# Altium PCB Clock_Lab.PcbDoc
Units mm, origin at the board's own origin, x right, y up, seen from the top; angles counter-clockwise.
Board outline 254.99 x 33.09 mm, 2 copper layers (Top Layer, Bottom Layer), stack 1.65 mm thick; 46 components, 26 nets, 170 pads, 249 vias.
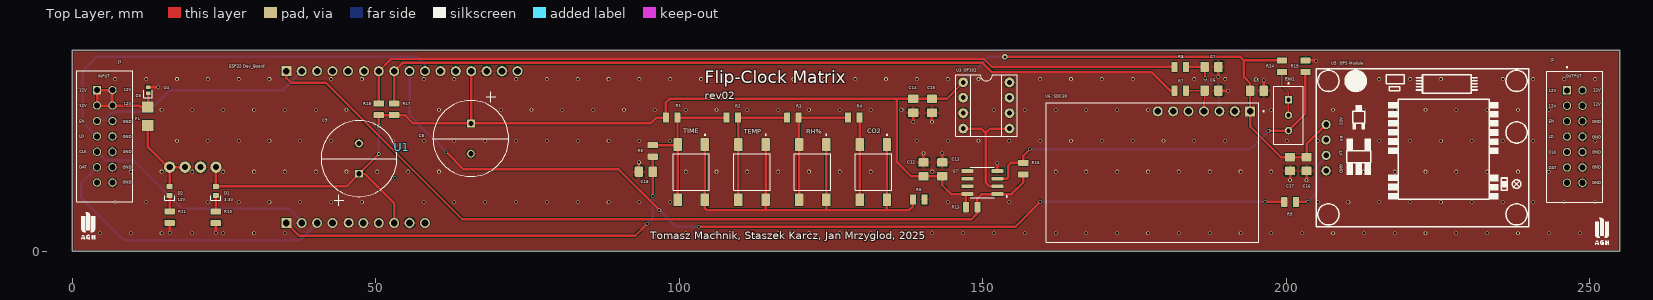
[diagram p0: Top Layer view]
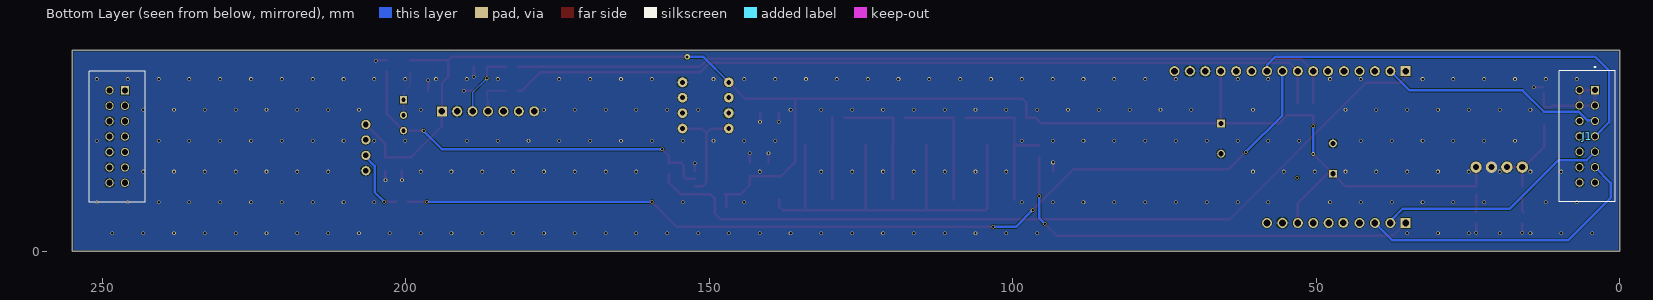
[diagram p1: Bottom Layer view, seen from below]
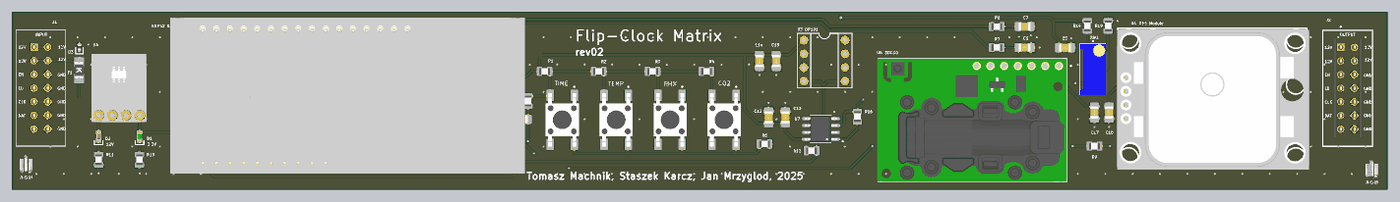
[diagram p2: 3D render of the assembled board from above, using the file's embedded part models]

## Layer stack, top to bottom
Top Solder: solder mask 0.0127, Solder Resist, Dk 3.8
Top Layer: signal copper 0.075
Dielectric: core 1.5, FR-4, Dk 4.5
Bottom Layer: signal copper 0.075
Bottom Solder: solder mask 0.0127, Solder Resist, Dk 3.8

## Board outline
0,0 0,33.087 254.987,33.087 254.987,0

## Design rules (kind name [scope] priority, off if disabled: settings)
BoardOutlineClearance [All] p1: gap=0.2 ignorepadtopadclearanceinfootprint=FALSE
Clearance [All] p1: gap=0.1 ignorepadtopadclearanceinfootprint=FALSE
ComponentClearance [All] p1: gap=0.127 collisioncheckmode=3 verticalgap=0.127 showdistances=TRUE
DiffPairsRouting [All] p1: maxlimit=0.381 minlimit=0.203 mostfreqgap=0.203 toplayer_minwidth=0.203 toplayer_maxwidth=25.4 toplayer_prefwidth=0.203 bottomlayer_minwidth=0.203 bottomlayer_maxwidth=25.4 bottomlayer_prefwidth=0.203 maxuncoupledlength=12.7
Height [All] p1: minheight=0 maxheight=1816.048 prefheight=12.7
HoleSize [All] p1: absolutevalues=TRUE maxlimit=6.3 minlimit=0.3 maxpercent=80.000 minpercent=20.000
HoleToHoleClearance [All] p1: gap=0.25 allowstackedmicrovias=FALSE
MinimumAnnularRing [All] p1: minimumring=0.076
MinimumSolderMaskSliver [All] p1: minsoldermaskwidth=0
PlaneClearance [All] p1: clearance=0.203
PlaneConnect PlaneConnectPowerPads [InPadClass('PowerPads')] p1: planeconnectstyle=Direct reliefexpansion=0.508 reliefentries=4 reliefconductorwidth=0.254 reliefairgap=0.254
PlaneConnect [All] p2: planeconnectstyle=Direct reliefexpansion=0.3 reliefentries=4 reliefconductorwidth=0.203 reliefairgap=0.203
PolygonConnect PolygonConnectPowerPads [All vs (InPadClass('PowerPads'))] p1: connectstyle=Direct reliefconductorwidth=0.254 reliefentries=4 polygonreliefangle="90 Angle" airgapwidth=0.254
PolygonConnect [All] p2: thpad.connectstyle=Relief thpad.reliefconductorwidth=0.4 thpad.reliefentries=4 thpad.polygonreliefangle="90 Angle" thpad.airgapwidth=0.203 smdpad.connectstyle=Relief smdpad.reliefconductorwidth=0.203 smdpad.reliefentries=4 smdpad.polygonreliefangle="90 Angle" smdpad.airgapwidth=0.203 via.connectstyle=Direct via.reliefconductorwidth=0.127 via.reliefentries=4 via.polygonreliefangle="90 Angle" via.airgapwidth=0.127
RoutingVias [All] p1: holewidth=0.3 width=0.6 viastyle="Through Hole" minholewidth=0.3 minwidth=0.6 maxholewidth=0.6 maxwidth=6.6
SilkToSilkClearance [All] p1: silktosilkclearance=0
SilkToSolderMaskClearance [IsPad] p1: minsilkscreentomaskgap=0.127 clearancetoexposedcopper=TRUE
SolderMaskExpansion [All] p1: expansion=0.075 istentingtop=FALSE
SupplyNets "Schematic Supply Nets_2" [InNet('VCC')] p1: voltage=0.000
SupplyNets "Schematic Supply Nets_1" [InNet('GND')] p2: voltage=0.000
SupplyNets "Schematic Supply Nets" [InNet('+12')] p3: voltage=0.000
UnRoutedNet [All] p1 off:
Width [All] p1: maxlimit=25.4 minlimit=0.203 preferedwidth=0.203 minimp=50.000000 maximp=50.000000 favimp=50.000000
19 further rules are at their usual default settings.

## Classes and differential pairs
component class Photodiode: C12 C13 C14 C15 R13 R14 R16 R19 RW1 U3 U7
component class Keyboard: C18 CO2 R1 R2 R3 R4 R5 R6 RH% TEMP TIME
component class GPS_Module: C16 C17 R9 U5
component class FlipDot_Matrix: D1 D2 D3 F1 J1 J2 R10 R11 U4
component class ESP: C8 C9 U1
component class CO2_Sensor: C5 C6 C7 R7 R8 R17 R18 U6

## Components (designator, comment, footprint, x,y, rotation, side; value= is the part's Value field where it differs from the comment)
C5 "100n" CAP_0805 195.209,26.416 r180 top
C6 "10p" CAP_0805 187.719,26.445 r180 top
C7 "10p" CAP_0805 187.719,30.343 r180 top
C8 "100u" CAPPRD500W60D1330H2700 65.678,18.542 r270 top
C9 "100u" CAPPRD500W60D1330H2700 47.244,15.24 r90 top
C12 "100n" CAP_0805 140.262,13.462 r270 top
C13 "10u" CAP_0805 143.361,13.462 r270 top
C14 "100n" CAP_0805 138.562,23.945 r90 top
C15 "10u" CAP_0805 141.662,23.945 r90 top
C16 "100n" CAP_0805 203.382,14.345 r90 top
C17 "10u" CAP_0805 200.66,14.351 r90 top
C18 "1n" CAP_0805 94.519,13.081 r0 top
CO2 "Tact_Switch" Tact_Switch 132,13 r270 top
D1 "GREEN" LED_0603_GREEN 23.646,9.906 r90 top
D2 "RED" LED_0603_RED 16.052,9.906 r90 top
D3 "D_TVS_0402" D_0402 12.505,26.485 r270 top
F1 "0.75A" FUSE_1206 12.446,22.225 r270 top
J1 "14-Pin Female Header" SAMTEC_14_PIN#1 4.826,18.835 r270 bottom
J2 "14-Pin Female Header (Passive)" SAMTEC_14_PIN#2 247.062,18.795 r270 top
R1 "1k" RES_0805 98.75,22 r180 top
R2 "1k" RES_0805 108.75,22 r180 top
R3 "1k" RES_0805 118.75,22 r180 top
R4 "1k" RES_0805 128.75,22 r180 top
R5 "20R" RES_0805 95.662,16.5 r90 top
R6 "20R" RES_0805 139.5,8.5 r180 top
R7 "20R" RES_0805 182.559,26.445 r180 top
R8 "20R" RES_0805 182.559,30.343 r180 top
R9 "10R" RES_0805 200.662,8.102 r180 top
R10 "560R" RES_0805 23.646,5.567 r90 top
R11 "5k" RES_0805 16.052,5.588 r90 top
R13 "4.7k" RES_0805 148.209,7.239 r180 top
R14 "330R" RES_0805 199.332,30.48 r90 top
R16 "1M" RES_0805 156.718,13.589 r90 top
R17 "4.7k" RES_0805 53.039,23.368 r90 top
R18 "4.7k" RES_0805 50.499,23.368 r90 top
R19 "330R" RES_0805 203.2,30.48 r270 top
RH% "Tact_Switch" Tact_Switch 122,13 r270 top
RW1 "50k" Potentiometer 200.406,22.387 r270 top
TEMP "Tact_Switch" Tact_Switch 112,13 r270 top
TIME "Tact_Switch" Tact_Switch 102,13 r270 top
U1 "ESP_Dev_Board" ESP_Dev_Board 37.799,26.485 r0 top
U3 "OPT101" OPT101 150.622,24.003 r270 top
U4 "DC/DC Converter AP63203" DC/DC_CONVERTER 19.862,17.945 r90 top
U5 "GY-NEO6MV2" GY-NEO6MV 225.462,20.445 r270 top
U6 "SCD30" SDC30 181.356,12.954 r0 top
U7 "LM393" LM393 149.956,11.303 r180 top

## Footprints (in the part's own frame and the unit in brackets; to place one, negate y for a bottom-side part, rotate by r counter-clockwise, add the part's x,y. Pads: shape width x height; smd on the part's side, far side on the other; paste and mask are expansions set on the pad)
CAP_0805 [mm]
  rrect25% 1.4x1.7 smd: 1(-1.143,0) 2(1.143,0)
  body extent -1.15,-0.76 1.15,0.79, height 1.01
CAPPRD500W60D1330H2700 [mm]
  rect 1.28x1.28 / inner round 1.28 / far side rect 1.28x1.28 hole 0.85: 1(-2.5,0)
  round 1.28 hole 0.85: 2(2.5,0)
  silkscreen extent -7.75,-6.25 6.25,6.25, body extent -5.05,-0.32 4.95,14.29, height 10.1
D_0402 [mm]
  rrect25% 0.6x0.7 smd: A(-0.5,0) K(0.5,0)
  silkscreen extent 0,-0.7 1.2,0.7, body extent -0.5,-0.25 0.5,0.25, height 0.51
DC/DC_CONVERTER [mil]
  round 74 hole 40: 1(-162,-150) 2(-162,-50) 3(-162,50) 4(-162,150)
  body extent -213,-199 287,201, height 83
ESP_Dev_Board [mm]
  round 1.65 hole 1.1: 0(7.62,3.156) 1(25.4,3.156) 2(10.285,3.156) 3(22.86,3.156) 4(5.08,3.156) 5(2.54,3.156) 12(15.24,3.156) 13(17.78,3.156) 14(12.7,3.156) 15(20.32,3.156) 16(0,3.156) 18(27.94,3.156) 19(30.48,3.156) 20(33.02,3.156) 21(35.56,3.156) 23(5.08,-21.844) 24(7.745,-21.819) 25(0,-21.844) 26(2.54,-21.844) 27(10.16,-21.844) 28(12.7,-21.844) 29(15.24,-21.844) 30(17.78,-21.844) 31(20.32,-21.844)
  rect 1.65x1.65 hole 1.1: 17(-2.54,3.156) 22(-2.54,-21.844)
  body extent -8.46,-23.49 57.24,5.54, height 15.4
FUSE_1206 [mm]
  rect 1.8x1.84 smd: 1(-1.5,0) 2(1.5,0)
  body extent -1.65,-0.82 1.65,0.81, height 0.84
GY-NEO6MV [mil] "GPS Breakout Board"
  round 60 hole 36 paste-99999 mask+10: 1(-16.19,-741.97) 2(83.81,-741.97) 3(183.81,-741.97) 4(283.81,-741.97)
  silkscreen extent -378,-806 646,572, body extent -369,-812 658,590, height 492
LED_0603_GREEN [mm]
  rrect25% 0.8x1 smd: A(0.75,0) K(-0.75,0)
  silkscreen extent -1.5,-0.8 -0.8,0.8, body extent -0.8,-0.4 0.8,0.4, height 0.6
LED_0603_RED [mm]
  rrect25% 0.8x1 smd: A(0.75,0) K(-0.75,0)
  silkscreen extent -1.5,-0.8 -0.8,0.8, body extent -0.8,-0.4 0.8,0.4, height 0.6
LM393 [mm]
  rrect25% 1.97x0.6 smd: 1(-2.47,1.905) 2(-2.47,0.635) 3(-2.47,-0.635) 4(-2.47,-1.905) 5(2.47,-1.905) 6(2.47,-0.635) 7(2.47,0.635) 8(2.47,1.905)
  silkscreen extent -4.14,-2.52 1.95,2.52, body extent -3,-2.45 3,2.45, height 1.75
OPT101 [mil]
  round 63 hole 32: 1(-150,-150) 2(-50,-150) 3(50,-150) 4(150,-150) 5(150,150) 6(50,150) 7(-50,150) 8(-150,150)
  silkscreen extent -200,-200 200,200, body extent -200,-200 200,200, height 63
Potentiometer [mm]
  rect 1.218x1.218 / inner round 1.218 / far side rect 1.218x1.218 hole 0.71: 1(-2.54,0)
  round 1.218 hole 0.71: 2(0,0) 3(2.54,0)
  silkscreen extent -5.35,-2.41 4.76,2.42, body extent -4.76,-2.41 4.76,2.42, height 11.55
RES_0805 [mm]
  rrect25% 1x1.7 smd: 1(-0.95,0) 2(0.95,0)
  body extent -1,-0.63 1,0.63, height 0.47
SAMTEC_14_PIN#1 [mm]
  rect 1.37x1.37 hole 1.02: 1(-7.69,0.75)
  round 1.37 hole 1.02: 2(-5.15,0.75) 3(-2.61,0.75) 4(-0.07,0.75) 5(2.47,0.75) 6(5.01,0.75) 7(7.55,0.75) 8(7.55,-1.79) 9(5.01,-1.79) 10(2.47,-1.79) 11(-0.07,-1.79) 12(-2.61,-1.79) 13(-5.15,-1.79) 14(-7.69,-1.79)
  silkscreen extent -11.61,-5.15 10.73,4.12, body extent -9.25,-3.1 9.04,1.98, height 8.51
SAMTEC_14_PIN#2 [mm]
  rect 1.37x1.37 hole 1.02: 1(-7.69,-0.75)
  round 1.37 hole 1.02: 2(-5.15,-0.75) 3(-2.61,-0.75) 4(-0.07,-0.75) 5(2.47,-0.75) 6(5.01,-0.75) 7(7.55,-0.75) 8(7.55,1.79) 9(5.01,1.79) 10(2.47,1.79) 11(-0.07,1.79) 12(-2.61,1.79) 13(-5.15,1.79) 14(-7.69,1.79)
  silkscreen extent -11.61,-4.12 10.73,5.15, body extent -9.25,-1.98 9.04,3.1, height 3.2
SDC30 [mm] "CO2 Sensor"
  rect 1.65x1.65 hole 1.1: 1(12.747,10.075)
  round 1.65 hole 1.1: 2(10.207,10.075) 3(7.667,10.075) 4(5.127,10.075) 5(2.587,10.075) 6(0.047,10.075) 7(-2.493,10.075)
  silkscreen extent -20.85,-11.53 15.05,11.47, body extent -20.88,-11.54 14.12,11.46, height 0.45
Tact_Switch [mm]
  rrect15% 2.1x1.38 smd: 1(-4.55,2.24) 1(4.55,2.24) 2(-4.55,-2.24) 2(4.55,-2.24)
  silkscreen extent -6.25,-3 3,3, body extent -5,-3 5,3, height 5.07

## Part data
C5 C6 C7 C12 C13 C14 C15 C16 C17 C18: library part CAP_0805, "Capacitor SMD 0805"
C8 C9: library part 478CKS010M, "4700 ÂµF 10 V Aluminum Electrolytic Capacitors Radial, Can 98.8mOhm @ 120Hz 2000 Hrs @ 85Â°C", Package="Radial Illinois Capacitor", Check_prices=https://www.snapeda.com/parts/478CKS010M/Illinois+Capacitor/view-part/?ref=eda, MF="Illinois Capacitor", MP=478CKS010M, SnapEDA_Link=https://www.snapeda.com/parts/478CKS010M/Illinois+Capacitor/view-part/?ref=snap
D1: library part LED_0603_GREEN, "LED 0603 GREEN SMD"
D2: library part LED_0603_RED, "LED 0603 RED SMD"
D3: "Diode TVS / ESD 0402"
F1: library part FUSE_PPTC_1206, "Fuse PPTC SMD 1206"
J1 J2: library part 14-Pin-Connector
R1 R2 R3 R4 R5 R6 R7 R8 R9 R10 R11 R13 R14 R16 R17 R18 R19: library part RES_0805, "Resistor SMD 0805"
RW1: library part Potentiometer
U1: "ESP Dev Board with lcd"
U3: "Photodiode Module"
U6: "SCD30 Series 5.5 V 75 mA Â±3% Carbon Dioxide (CO2) Sensor Module", Package=None, Availability=Unavailable, MP=SCD30, Price=None
U7: "LLM393 - Comparator"

## Via types
v1: diameter 0.6, hole 0.4, Top Layer to Bottom Layer, tented both sides, 248 vias
v2: diameter 0.9, hole 0.5, Top Layer to Bottom Layer, tented both sides, 1 vias

## Nets (pads, with @x,y where several pads share a name; then routed paths per layer and width w, separated by ;. In a path a pad name is that pad's centre, name@x,y a point inside that pad or via, vN(x,y) a via of type N, cw(c..) or ccw(c..) an arc to the next point about the centre after c; other vN are vias at no path point)
+12: D2.A F1.2 U4.3 U4.4 | length 14.3
  Top Layer w0.406: F1.2 12.446,17.145 15.761,13.83 U4.4 ; D2.A U4.4 ; U4.3 U4.4
CLK: J1.5 U1.25 | length 38.8
  Bottom Layer w0.406: J1.5 5.436,15.005 10.075,15.005 18.095,6.985 35.75,6.985 37.799,4.936 U1.25
DATA: J1.6 U1.26 | length 49.1
  Bottom Layer w0.406: J1.6 1.5,11.249 1.5,8.75 8.5,1.75 37.448,1.75 U1.26
EN: J1.3 U1.16 | length 37.1
  Bottom Layer w0.406: J1.3 4.228,21.597 5.371,21.597 6.77,22.997 12.511,22.997 16,26.485 34.643,26.485 U1.16
GND: C5.1 C6.1 C7.1 C8.2 C9.2 C12.1 C13.1 C14.1 C15.1 C16.1 C17.1 C18.1 D3.A J1.8 J1.9 J1.10 J1.11 J1.12 J2.8 J2.9 J2.10 J2.11 J2.12 R6.1 R10.1 R11.1 R19.1 U1.19 U1.20 U1.30 U3.3 U3.8 U4.2 U5.4 U6.2 U7.4 | length 23
  Top Layer w0.406: D3.A@12.708,26.985 14.144,26.985 v1(14.148,26.981) ; v1(16.052,3.048) R11.1@16.052,4.514 ; v1(23.646,3.048) R10.1@23.646,4.575 ; C18.1@93.376,13.139 v1(93.376,14.605) ; v1(138.562,21.336) C14.1 ; C12.1@140.262,14.663 v1(140.262,16.129) ; v1(141.662,21.336) C15.1 ; C13.1@143.361,14.663 v1(143.361,16.129) ; U7.4@152.426,13.125 v1(152.426,14.478) ; C6.1 188.891,26.416 v1(190.5,26.416) ; v1(188.862,28.702) C7.1 ; v1(196.328,28.159) 196.328,26.441 C5.1 ; C17.1 200.663,12.711 v1(200.663,11.684) ; R19.1 204.865,31.43 204.926,31.369 v1(204.978,31.369) ; v1(203.379,11.684) 203.379,12.705 C16.1
  other v1: 4.548,2.947 9.628,2.947 14.708,2.947 19.788,2.947 24.868,2.947 29.948,2.947 35.028,2.947 95.988,2.947 101.068,2.947 106.148,2.947 111.228,2.947 116.308,2.947 121.388,2.947 126.468,2.947 131.548,2.947 136.628,2.947 141.708,2.947 146.788,2.947 151.868,2.947 156.948,2.947 162.028,2.947 167.108,2.947 172.188,2.947 177.268,2.947 182.348,2.947 187.428,2.947 192.508,2.947 197.588,2.947 202.668,2.947 207.748,2.947 212.828,2.947 217.908,2.947 222.988,2.947 228.068,2.947 233.148,2.947 238.228,2.947 243.308,2.947 248.388,2.947 7.088,8.027 12.168,8.027 22.328,8.027 27.408,8.027 32.488,8.027 37.568,8.027 42.648,8.027 47.728,8.027 57.888,8.027 62.968,8.027 68.048,8.027 73.128,8.027 78.208,8.027 83.288,8.027 88.368,8.027 93.448,8.027 98.528,8.027 144.248,8.027 154.408,8.027 205.208,8.027 210.288,8.027 215.368,8.027 220.448,8.027 225.528,8.027 230.608,8.027 235.688,8.027 240.768,8.027 245.848,8.027 250.928,8.027 9.628,13.107 14.708,13.107 19.788,13.107 24.868,13.107 29.948,13.107 35.028,13.107 40.108,13.107 45.188,13.107 50.268,13.107 55.348,13.107 60.428,13.107 101.068,13.107 106.148,13.107 111.228,13.107 116.308,13.107 121.388,13.107 126.468,13.107 131.548,13.107 141.708,13.107 162.028,13.107 167.108,13.107 172.188,13.107 177.268,13.107 182.348,13.107 187.428,13.107 192.508,13.107 197.588,13.107 212.828,13.107 217.908,13.107 222.988,13.107 228.068,13.107 233.148,13.107 238.228,13.107 243.308,13.107 17.248,18.187 22.328,18.187 27.408,18.187 32.488,18.187 37.568,18.187 42.648,18.187 52.808,18.187 57.888,18.187 62.968,18.187 68.048,18.187 73.128,18.187 78.208,18.187 83.288,18.187 88.368,18.187 93.448,18.187 98.528,18.187 139.168,18.187 144.248,18.187 149.328,18.187 154.408,18.187 159.488,18.187 164.568,18.187 169.648,18.187 174.728,18.187 179.808,18.187 184.888,18.187 189.968,18.187 200.128,18.187 205.208,18.187 210.288,18.187 215.368,18.187 220.448,18.187 225.528,18.187 230.608,18.187 235.688,18.187 240.768,18.187 250.928,18.187 14.708,23.267 19.788,23.267 24.868,23.267 29.948,23.267 35.028,23.267 40.108,23.267 45.188,23.267 60.428,23.267 70.588,23.267 75.668,23.267 80.748,23.267 85.828,23.267 90.908,23.267 95.988,23.267 101.068,23.267 106.148,23.267 111.228,23.267 116.308,23.267 121.388,23.267 126.468,23.267 131.548,23.267 136.628,23.267 151.868,23.267 156.948,23.267 162.028,23.267 167.108,23.267 172.188,23.267 177.268,23.267 197.588,23.267 207.748,23.267 212.828,23.267 217.908,23.267 222.988,23.267 228.068,23.267 233.148,23.267 238.228,23.267 243.308,23.267 7.088,28.347 12.168,28.347 17.248,28.347 22.328,28.347 27.408,28.347 32.488,28.347 42.648,28.347 47.728,28.347 57.888,28.347 62.968,28.347 73.128,28.347 78.208,28.347 83.288,28.347 88.368,28.347 93.448,28.347 98.528,28.347 103.608,28.347 108.688,28.347 113.768,28.347 118.848,28.347 123.928,28.347 129.008,28.347 134.088,28.347 139.168,28.347 144.248,28.347 149.328,28.347 159.488,28.347 164.568,28.347 169.648,28.347 174.728,28.347 184.888,28.347 189.968,28.347 195.048,28.347 200.128,28.347 205.208,28.347 210.288,28.347 215.368,28.347 220.448,28.347 225.528,28.347 230.608,28.347 235.688,28.347 240.768,28.347 245.848,28.347 250.928,28.347
GPS_RX: R9.2 U1.13 | length 160.7
  Top Layer w0.406: v1(61.648,16.296) 64.482,13.462 90.038,13.462 v1(96.75,6.75) ; v1(103.25,4) 155.384,4 v1(159.486,8.102) ; v1(196.596,8.102) R9.2
  Bottom Layer w0.406: U1.13 55.579,22.365 v1(61.648,16.296) ; v1(96.75,6.75) 99.5,4 v1(103.25,4) ; v1(159.486,8.102) v1(196.596,8.102)
LD: J1.4 U1.15 | length 70.7
  Bottom Layer w0.406: J1.4 1.75,21.231 1.75,29.75 4,32 56.775,32 58.119,30.656 U1.15
NetC6_2: C6.2 R7.1 U6.4 | length 6.7
  Top Layer w0.254: R7.1 C6.2 ; U6.4 186.483,24.679 186.576,24.771 C6.2 ; C6.2@186.483,26.352 C6.2
NetC7_2: C7.2 R8.1 U6.3 | length 11.4
  Top Layer w0.406: R8.1 C7.2 186.653,30.266 186.653,28.485 v1(186.69,28.448)
  Bottom Layer w0.254: v1(186.69,28.448) 189.023,26.115 U6.3
NetCO2_1: CO2.1 R6.2 RH%.1 TEMP.1 TIME.1 | length 78.8
  Top Layer w0.406: TIME.1@104.24,17.55 104.24,8.45 104.24,6.988 104.478,6.75 114.25,6.75 ; TEMP.1@114.24,17.55 114.24,8.45 114.24,6.76 114.25,6.75 ; RH%.1@124.24,17.55 124.24,8.45 124.24,6.76 124.25,6.75 ; CO2.1@134.24,17.55 134.24,8.45 134.24,6.75 ; R6.2 138.513,8.463 138.513,7.357 137.906,6.75 134.24,6.75 ; 114.25,6.75 124.25,6.75 ; 124.25,6.75 134.24,6.75
NetCO2_2: CO2.2 R4.1 | length 13.6
  Top Layer w0.406: R4.1 129.73,21.97 129.73,17.58 129.76,17.55 CO2.2@129.76,8.45
NetD1_K: D1.K R10.2 | length 2.8
  Top Layer w0.406: R10.2 D1.K@23.646,9.269
NetD2_K: D2.K R11.2 | length 2.7
  Top Layer w0.406: R11.2@15.899,6.52 16.052,6.673 D2.K
NetD3_K: D3.K F1.1 J1.1 J1.2 J1.13 J1.14 | length 18.4
  Top Layer w0.406: D3.K 12.505,23.784 F1.1 11.303,23.725 11.043,23.985 J1.13 ; J1.13 J1.14 J1.1 J1.2 J1.13
NetR1_1: R1.1 R2.2 R5.2 TIME.2 | length 25.8
  Top Layer w0.406: R5.2 99.66,17.45 TIME.2@99.76,17.55 ; TIME.2@99.76,8.45 TIME.2@99.76,17.55 ; R2.2 R1.1 99.73,21.97 99.73,17.58 TIME.2@99.76,17.55
NetR2_1: R2.1 R3.2 TEMP.2 | length 21.7
  Top Layer w0.406: TEMP.2@109.76,8.45 109.76,17.55 109.73,17.58 109.73,21.97 R2.1 R3.2
NetR3_1: R3.1 R4.2 RH%.2 | length 21.7
  Top Layer w0.406: RH%.2@119.76,8.45 119.76,17.55 119.73,17.58 119.73,21.97 R3.1 R4.2
NetR9_1: R9.1 U5.3 | length 10.9
  Top Layer w0.406: R9.1 v1(203.562,8.102)
  Bottom Layer w0.406: v1(203.562,8.102) 205.162,9.702 205.162,14.045 206.628,15.511 U5.3@206.628,15.757
NetR14_1: R14.1 RW1.1 RW1.2 | length 7.6
  Top Layer w0.254: R14.1 199.332,27.271 200.406,26.197 RW1.1 RW1.2
NetR16_2: R16.2 R19.2 RW1.3 U7.3 | length 63.9
  Top Layer w0.406: U7.3 153.995,11.938 154.233,12.176 154.233,14.086 154.673,14.526 156.705,14.526 R16.2 156.718,15.705 v1(157.8,16.787) ; v1(197.104,19.812) 197.122,19.83 200.388,19.83 RW1.3 203.2,22.641 R19.2
  Bottom Layer w0.406: v1(157.8,16.787) 194.079,16.787 v1(197.104,19.812)
NetU3_4: U3.4 U3.5 U7.2 | length 18.6
  Top Layer w0.406: U3.4 149.733,20.193 150.495,19.431 ; U7.2 151.13,10.668 150.495,11.303 150.495,19.431 ; U3.5 151.257,20.193 150.495,19.431
SCL: R8.2 R18.2 U1.14 | length 137.8
  Top Layer w0.406: R18.2 U1.14 52.514,31.656 150.275,31.656 151.588,30.343 R8.2
SDA: R7.2 R17.2 U1.12 | length 136.3
  Top Layer w0.406: R17.2 U1.12 54.398,31 150.003,31 151.497,29.506 177.845,29.506 180.906,26.445 R7.2
SVN: R13.1 R16.1 U1.17 U7.1 | length 137.5
  Top Layer w0.406: U1.17 35.259,28.517 36.026,27.75 41.757,27.75 64.257,5.25 148.162,5.25 149.159,6.247 R13.1@149.159,7.072 ; R13.1@148.992,7.072 R13.1 149.159,8.683 149.874,9.398 U7.1 154.773,9.398 156.718,11.343 R16.1
SVP: C18.2 R5.1 U1.22 | length 73.9
  Top Layer w0.406: U1.22 37.381,2.519 ; 38.7,2.519 37.381,2.519 ; v1(94.733,4.491) 92.76,2.519 37.381,2.519 ; v1(95.631,9.041) 95.647,9.056 95.647,13.066 C18.2 R5.1
  Bottom Layer w0.406: v1(94.733,4.491) 95.631,5.39 v1(95.631,9.041)
VCC: C5.2 C8.1 C9.1 C12.2 C13.2 C14.2 C15.2 C16.2 C17.2 D1.A R1.2 R13.2 R14.2 R17.1 R18.1 U1.18 U1.29 U3.1 U4.1 U5.1 U6.1 U7.8 | length 270.2
  Top Layer w0.406: U4.1 23.659,13.817 23.659,10.669 D1.A 45.16,10.656 C9.1 ; v1(50.499,16.002) 50.499,15.995 C9.1 ; v1(50.499,20.575) R18.1 R17.1 54.798,22.418 56.174,21.042 C8.1 ; U1.29@53.039,5.328 53.039,7.921 48.256,12.704 47.28,12.704 C9.1 ; U1.18 65.739,21.103 C8.1 ; R1.2@97.8,21.848 R1.2 ; U3.1 144.087,25.088 C15.2 C14.2 135.89,25.088 ; R13.2 147.259,9.301 U7.8@147.356,9.398 ; U7.8 U7.8@147.356,9.398 ; v2(153.67,32.004) 192.482,32.004 193.056,31.43 ; R14.2 193.056,31.43 ; U5.1 203.382,17.622 C16.2 203.379,15.491 200.663,15.491 C17.2 199.13,15.494 194.103,20.521 U6.1 194.066,23.066 C5.2 194.066,27.648 193.056,28.658 193.056,31.43 ; C8.1 95.292,21.042 96.25,22 R1.2 ; R1.2 97.8,24.497 98.391,25.088 135.89,25.088 ; 135.89,25.088 135.89,14.666 138.237,12.319 C12.2 C13.2 143.361,10.846 144.809,9.398 U7.8@147.356,9.398
  Bottom Layer w0.406: v1(50.499,16.002) v1(50.499,20.575) ; U3.1 151.003,32.004 v2(153.67,32.004)
pads on no net: J1.7 J2.1 J2.2 J2.3 J2.4 J2.5 J2.6 J2.7 J2.13 J2.14 U1.0 U1.1 U1.2 U1.3 U1.4 U1.5 U1.21 U1.23 U1.24 U1.27 U1.28 U1.31 U3.2 U3.6 U3.7 U5.2 U6.5 U6.6 U6.7 U7.5 U7.6 U7.7
copper on no net:
  other v1: 53.126,12.065

## Polygon pours and split planes (outlines as drawn)
GND on Bottom Layer "GND_L02_P000" (solid, pour order 0): 0,0 0,33.087 254.987,33.087 254.987,0
GND on Top Layer "GND_L01_P001" (solid, pour order 1): 0,0 0,33.087 254.987,33.087 254.987,0

## Silkscreen, mask and mechanical layers (free items; w line width, h text height)
Top Overlay:
  drawing of 32 lines, arcs and shapes, not listed
  text "GPS Module" at 208.841,30.707 h0.51
  text "ESP32 Dev_Board" at 25.85,30.185 h0.51
  text "INPUT" at 4.277,28.601 h0.51
  text "OUTPUT" at 246.101,28.601 h0.51
  text "Flip-Clock Matrix" at 104.254,27.681 h2.03
  text "12V" at 8.501,26.299 h0.51
  text "12V" at 1.117,26.263 h0.51
  text "12V" at 250.65,26.241 h0.51
  text "12V" at 243.266,26.205 h0.51
  text "SDC30" at 161.748,25.246 h0.51
  text "rev02" at 104.254,25.004 h1.27
  text "12V" at 8.501,23.998 h0.51
  text "12V" at 250.65,23.94 h0.51
  text "12V" at 1.119,23.667 h0.51
  text "12V" at 243.268,23.609 h0.51
  text "EN" at 1.117,21.183 h0.51
  text "EN" at 243.266,21.125 h0.51
  text "GND" at 8.351,21.101 h0.51
  text "GND" at 250.5,21.043 h0.51
  text "LD" at 1.117,18.643 h0.51
  text "GND" at 8.351,18.601 h0.51
  text "LD" at 243.266,18.585 h0.51
  text "GND" at 250.5,18.543 h0.51
  text "CLK" at 1.117,16.103 h0.51
  text "GND" at 8.351,16.101 h0.51
  text "CLK" at 243.266,16.045 h0.51
  text "GND" at 250.5,16.043 h0.51
  text "GND" at 8.351,13.601 h0.51
  text "DAT" at 1.117,13.563 h0.51
  text "GND" at 250.5,13.543 h0.51
  text "DAT" at 243.266,13.505 h0.51
  text "GND" at 8.351,11.101 h0.51
  text "GND" at 250.5,11.043 h0.51
  text "12V" at 17.372,8.228 h0.51
  text "3.3V" at 25.042,8.228 h0.51
  text "Tomasz Machnik, Staszek Karcz, Jan Mrzyglod, 2025" at 95.25,1.947 h1.27
Bottom Overlay:
  lines w0.1: 242.947,8.07 252.217,8.07 252.217,29.66 242.947,29.66 242.947,8.07
Mechanical 15:
  the board outline again, w0.254

## Text inside footprints (layer, text, board x,y; h text height)
D1: Mechanical 13 "+" at 23.037,11.223 h0.51 r90
D2: Mechanical 13 "+" at 25.116,3.729 h0.51 r90
U3: Top Overlay "OP101" at 146.912,29.564 h0.51
U5: Top Overlay "GND" at 209.39,14.273 h0.51 r90; Top Overlay "TX" at 209.369,16.574 h0.51 r90; Top Overlay "RX" at 209.419,18.974 h0.51 r90; Top Overlay "VCC" at 209.365,22.048 h0.51 r90